# EAGLE board labwiz-module_full_breakout (EAGLE 6.5.0)
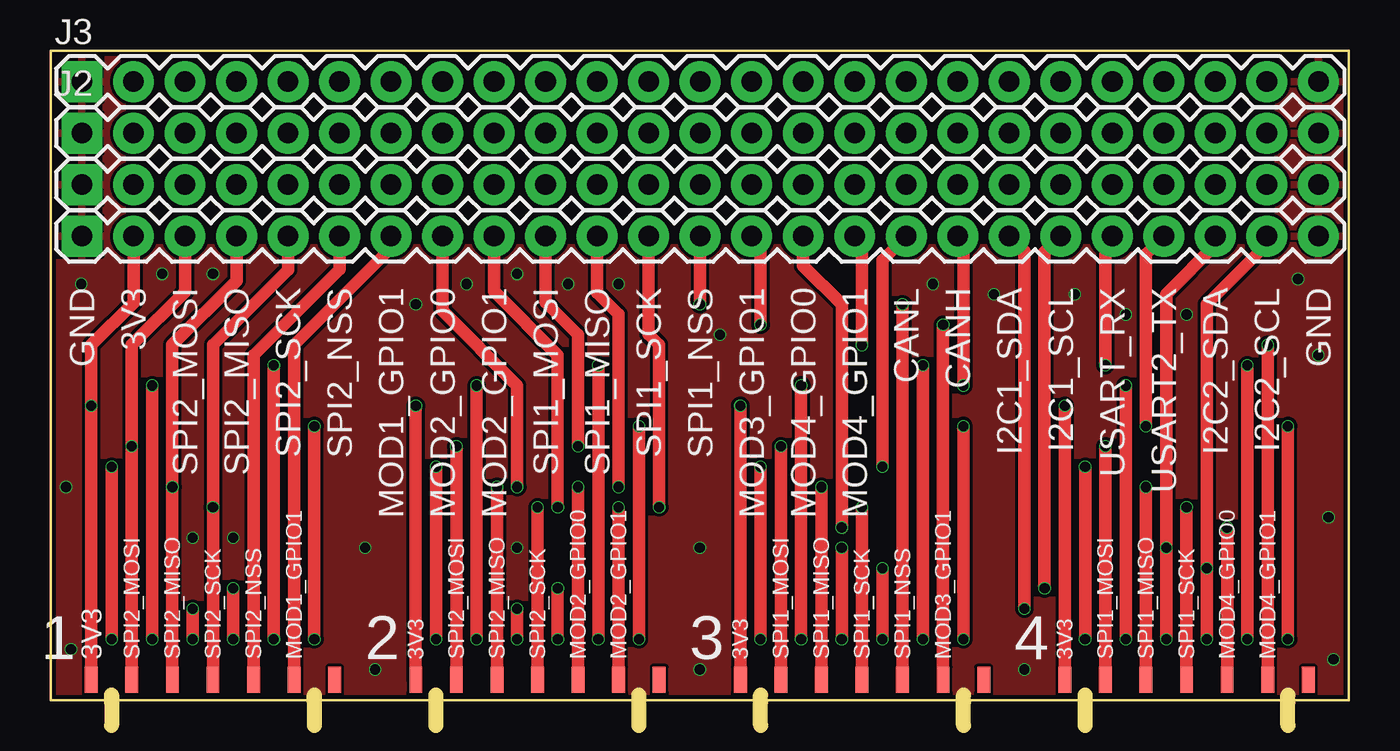
[diagram p0: board, top side]
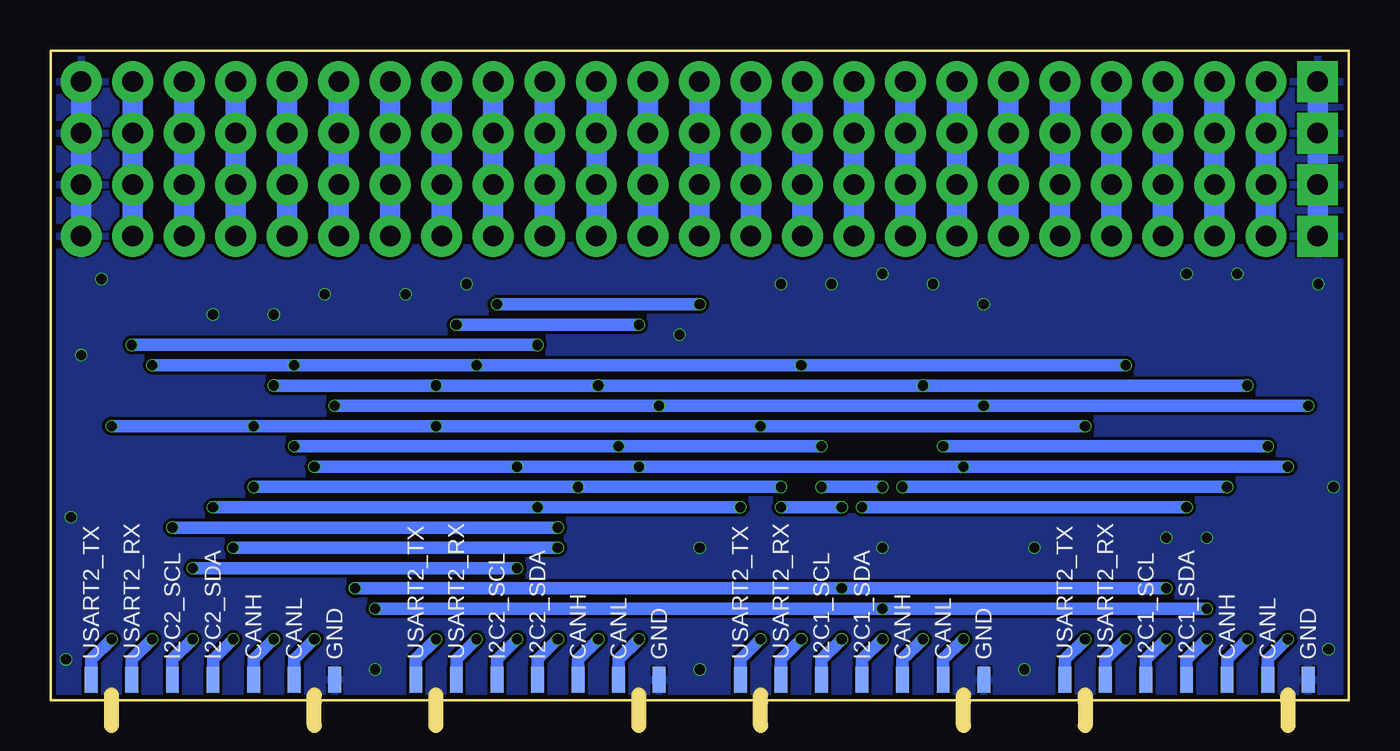
[diagram p1: board, bottom side, seen from below]

Size 64 x 32 mm. Coordinates in mm from the lower left corner, seen from the top.
Outline: 0,32 0,0 64,0 64,32 0,32
Copper layers (1*2+15*16): Top 0.017mm / dielectric 0.5mm / GND 0.017mm / dielectric 0.075mm / 3.3V 0.017mm / dielectric 0.5mm / Bottom 0.017mm
Design rules "PaxInstrument-T400 *": minimum track width 0.1mm, minimum drill 0.2mm, track to track 0.075mm, track to pad 0.075mm, pad to pad 0.075mm, via to via 0.075mm, smd to smd 0.075mm, copper to edge 0.2mm, drill to drill 0.2mm, minimum pad ring 0.5mm, minimum via ring 0.05mm, stop-mask expansion 0.01mm, vias tented up to drill 0.25mm, thermal gap 0.1mm
Net classes: 0 Digital signal: width 0.1 mm, drill 0.2 mm, clearance 0.15 mm; 1 3.3V power: width 0.1 mm, drill 0.2 mm, clearance 0.15 mm; 2 RTC battery: width 0.1 mm, drill 0.2 mm, clearance 0.15 mm; 3 5V power: width 0.1 mm, drill 0.2 mm, clearance 0.15 mm; 4 Analog signal: width 0.1 mm, drill 0.2 mm, clearance 0.15 mm; 5 GND: width 0.1 mm, drill 0.2 mm, clearance 0.15 mm
Milling: 8 lines

## Footprints (pad centres in the part's own frame; a part is rotated, then mirrored left to right if it is on the bottom)
1X25 = drill 1.016 pad 1.88 square: 1 0,0 | drill 1.016 pad 1.88: 2 2.54,0; 3 5.08,0; 4 7.62,0; 5 10.16,0; 6 12.7,0; 7 15.24,0; 8 17.78,0; 9 20.32,0; 10 22.86,0; 11 25.4,0; 12 27.94,0; 13 30.48,0; 14 33.02,0; 15 35.56,0; 16 38.1,0; 17 40.64,0; 18 43.18,0; 19 45.72,0; 20 48.26,0; 21 50.8,0; 22 53.34,0; 23 55.88,0; 24 58.42,0; 25 60.96,0
M07X2_2MM_EDGE = smd 0.635 x 1.27: P$1 0,0; P$3 2,0; P$5 4,0; P$7 6,0; P$9 8,0; P$11 10,0; P$13 12,0 | smd 0.635 x 1.27 bottom: P$2 0,0; P$4 2,0; P$6 4,0; P$8 6,0; P$10 8,0; P$12 10,0; P$14 12,0

## Placement (x,y rotation side)
J1  [1X25]  1.54,25.4 0 top
J2  [1X25]  1.54,27.94 0 top
J3  [1X25]  1.54,30.48 0 top
J4  [1X25]  1.54,22.86 0 top
MODULE5  PI-module-male  [M07X2_2MM_EDGE]  14,1 180 top
MODULE6  PI-module-male  [M07X2_2MM_EDGE]  30,1 180 top
MODULE7  PI-module-male  [M07X2_2MM_EDGE]  46,1 180 top
MODULE8  PI-module-male  [M07X2_2MM_EDGE]  62,1 180 top

## Library data of the parts
J1-J4 = SparkFun-Connectors
MODULE5-MODULE8 = PaxInstruments-Connectors; MF: Pax Instruments; MPN: PIxxxx

## Nets
3.3V: J1.2 J2.2 J3.2 J4.2 MODULE5.P$13 MODULE6.P$13 MODULE7.P$13 MODULE8.P$13
CANH: J1.18 J2.18 J3.18 J4.18 MODULE5.P$10 MODULE6.P$10 MODULE7.P$10 MODULE8.P$10
CANL: J1.17 J2.17 J3.17 J4.17 MODULE5.P$12 MODULE6.P$12 MODULE7.P$12 MODULE8.P$12
GND: J1.1 J1.25 J2.1 J2.25 J3.1 J3.25 J4.1 J4.25 MODULE5.P$14 MODULE6.P$14 MODULE7.P$14 MODULE8.P$14
I2C1_SCL: J1.20 J2.20 J3.20 J4.20 MODULE5.P$6 MODULE6.P$6
I2C1_SDA: J1.19 J2.19 J3.19 J4.19 MODULE5.P$8 MODULE6.P$8
I2C2_SCL: J1.24 J2.24 J3.24 J4.24 MODULE7.P$6 MODULE8.P$6
I2C2_SDA: J1.23 J2.23 J3.23 J4.23 MODULE7.P$8 MODULE8.P$8
MOD1_GPIO1: J1.7 J2.7 J3.7 J4.7 MODULE5.P$3
MOD2_GPIO0: J1.8 J2.8 J3.8 J4.8 MODULE6.P$5
MOD2_GPIO1: J1.9 J2.9 J3.9 J4.9 MODULE6.P$3
MOD3_GPIO1: J1.14 J2.14 J3.14 J4.14 MODULE7.P$3
MOD4_GPIO0: J1.15 J2.15 J3.15 J4.15 MODULE8.P$5
MOD4_GPIO1: J1.16 J2.16 J3.16 J4.16 MODULE8.P$3
SPI1_MISO: J1.11 J2.11 J3.11 J4.11 MODULE7.P$9 MODULE8.P$9
SPI1_MOSI: J1.10 J2.10 J3.10 J4.10 MODULE7.P$11 MODULE8.P$11
SPI1_NSS: J1.13 J2.13 J3.13 J4.13 MODULE7.P$5
SPI1_SCK: J1.12 J2.12 J3.12 J4.12 MODULE7.P$7 MODULE8.P$7
SPI2_MISO: J1.4 J2.4 J3.4 J4.4 MODULE5.P$9 MODULE6.P$9
SPI2_MOSI: J1.3 J2.3 J3.3 J4.3 MODULE5.P$11 MODULE6.P$11
SPI2_NSS: J1.6 J2.6 J3.6 J4.6 MODULE5.P$5
SPI2_SCK: J1.5 J2.5 J3.5 J4.5 MODULE5.P$7 MODULE6.P$7
USART2_RX: J1.21 J2.21 J3.21 J4.21 MODULE5.P$4 MODULE6.P$4 MODULE7.P$4 MODULE8.P$4
USART2_TX: J1.22 J2.22 J3.22 J4.22 MODULE5.P$2 MODULE6.P$2 MODULE7.P$2 MODULE8.P$2

## Tracks (layer width: path | path; a pad name or v marks a point on that pad's centre or on a via)
3.3V  (via drill 0.5)
  Top 0.61: MODULE5.P$13 v2,14.5 2,17.5 4.08,19.58 J4.2 | v50,14.5 MODULE8.P$13 | MODULE7.P$13 v34,14.5 | MODULE6.P$13 v18,14.5
  Bottom 0.61: v2,14.5 v18,14.5 v34,14.5 v50,14.5
  Bottom 1.016: J4.2 J1.2 J2.2 J3.2
CANH  (via drill 0.5)
  Top 0.61: v21,3 v21,15.5 | v5,15.5 v5,3 | v37,3 v37,15.5 | v53,3 v53,15.5 | v45,15.5 45,22.58 J4.18
  Bottom 0.61: MODULE6.P$10 22,2 v21,3 | v5,15.5 v21,15.5 v37,15.5 v45,15.5 v53,15.5 | v5,3 6,2 MODULE5.P$10 | MODULE7.P$10 38,2 v37,3 | MODULE8.P$10 54,2 v53,3
  Bottom 1.016: J4.18 J1.18 J2.18 J3.18
CANL  (via drill 0.5)
  Top 0.61: v51,11.5 v51,3 | v3,3 v3,11.5 | v19,11.5 v19,3 | v35,3 v35,11.5 | v41,11.5 41,21.68 J4.17
  Bottom 0.61: MODULE7.P$12 36,2 v35,3 | v51,11.5 v41,11.5 v35,11.5 v19,11.5 v3,11.5 | v51,3 52,2 MODULE8.P$12 | MODULE5.P$12 4,2 v3,3 | v19,3 20,2 MODULE6.P$12
  Bottom 1.016: J4.17 J1.17 J2.17 J3.17
GND  (via drill 0.5)
  Bottom 1.016: J4.25 J1.25 J2.25 J3.25 | J3.1 J2.1 J1.1 J4.1
  other vias: 1.5,20.5 1,2.5 16,1.5 32,1.5 48,1.5 63.25,2 61.5,20.75 56,19 53,19 50.5,20 46.5,20 43.5,20.5 33,18 32,7.5 28,20.5 23,7.5 18,19.5 9,8 7,8 8,21 5.5,21 15.5,7.5 23,21 25.5,20.5 0.75,10.5 63,9 62.5,17 20.5,20.5
  pour Bottom: 0,32 0,0 64,0 64,32
  pour Top: 0,32 0,0 64,0 64,32
I2C1_SCL  (via drill 0.5)
  Top 0.61: v25,3 v25,5.5 | v9,5.5 v9,3 | v49,5.5 49,22.06 J4.20
  Bottom 0.61: MODULE6.P$6 26,2 v25,3 | v9,5.5 v25,5.5 v49,5.5 | v9,3 10,2 MODULE5.P$6
  Bottom 1.016: J4.20 J1.20 J2.20 J3.20
I2C1_SDA  (via drill 0.5)
  Top 0.61: v23,3 v23,4.5 | v7,4.5 v7,3 | v48,4.5 48,22.12 J4.19
  Bottom 0.61: MODULE6.P$8 24,2 v23,3 | v7,4.5 v23,4.5 v48,4.5 | v7,3 8,2 MODULE5.P$8
  Bottom 1.016: J4.19 J1.19 J2.19 J3.19
I2C2_SCL  (via drill 0.5)
  Top 0.61: v41,3 v41,6.5 | v57,3 v57,6.5 57,19.5 60,22.5 60,22.82 J4.24
  Bottom 0.61: MODULE8.P$6 58,2 v57,3 | MODULE7.P$6 42,2 v41,3 | v41,6.5 v57,6.5
  Bottom 1.016: J4.24 J1.24 J2.24 J3.24
I2C2_SDA  (via drill 0.5)
  Top 0.61: v55,3 v55,7.5 55,20 57.5,22.5 57.5,22.78 J4.23 | v39,3 v39,7.5
  Bottom 0.61: MODULE8.P$8 56,2 v55,3 | MODULE7.P$8 40,2 v39,3 | v39,7.5 v55,7.5
  Bottom 1.016: J4.23 J1.23 J2.23 J3.23
MOD1_GPIO1
  Top 0.61: MODULE5.P$3 12,17.5 16.78,22.28 J4.7
  Bottom 1.016: J4.7 J1.7 J2.7 J3.7
MOD2_GPIO0  (via drill 0.5)
  Top 0.61: MODULE6.P$5 v26,10.5 | v23,10.5 23,15.5 19.32,19.18 J4.8
  Bottom 0.61: v26,10.5 v23,10.5
  Bottom 1.016: J4.8 J1.8 J2.8 J3.8
MOD2_GPIO1  (via drill 0.5)
  Top 0.61: MODULE6.P$3 v28,9.5 | v25,9.5 25,17 21.86,20.14 J4.9
  Bottom 0.61: v28,9.5 v25,9.5
  Bottom 1.016: J4.9 J1.9 J2.9 J3.9
MOD3_GPIO1  (via drill 0.5)
  Top 0.61: MODULE7.P$3 v44,18.5 | J4.14 35,22.42 v35,18.5
  Bottom 0.61: v44,18.5 v35,18.5
  Bottom 1.016: J4.14 J1.14 J2.14 J3.14
MOD4_GPIO0  (via drill 0.5)
  Top 0.61: MODULE8.P$5 v58,8.5 | v39,8.5 39,19.5 37.1,21.4 J4.15
  Bottom 0.61: v58,8.5 v39,8.5
  Bottom 1.016: J4.15 J1.15 J2.15 J3.15
MOD4_GPIO1  (via drill 0.5)
  Top 0.61: MODULE8.P$3 v60,17.5 | J4.16 40,22.5 v40,17.5
  Bottom 0.61: v60,17.5 v40,17.5
  Bottom 1.016: J4.16 J1.16 J2.16 J3.16
SPI1_MISO  (via drill 0.5)
  Top 0.61: MODULE7.P$9 v38,10.5 | MODULE8.P$9 v54,10.5 | v28,10.5 28,19 26.94,20.06 J4.11
  Bottom 0.61: v54,10.5 v38,10.5 v28,10.5
  Bottom 1.016: J4.11 J1.11 J2.11 J3.11
SPI1_MOSI  (via drill 0.5)
  Top 0.61: MODULE7.P$11 v36,12.5 | v52,12.5 MODULE8.P$11 | v26,12.5 26,18 24.4,19.6 J4.10
  Bottom 0.61: v52,12.5 v36,12.5 v26,12.5
  Bottom 1.016: J4.10 J1.10 J2.10 J3.10
SPI1_NSS  (via drill 0.5)
  Top 0.61: MODULE7.P$5 v42,19.5 | J4.13 32,22.84 v32,19.5
  Bottom 0.61: v42,19.5 v32,19.5
  Bottom 1.016: J4.13 J1.13 J2.13 J3.13
SPI1_SCK  (via drill 0.5)
  Top 0.61: MODULE7.P$7 v40,9.5 | MODULE8.P$7 v56,9.5 | v30,9.5 30,17.5 29.48,18.02 J4.12
  Bottom 0.61: v56,9.5 v40,9.5 v30,9.5
  Bottom 1.016: J3.12 J2.12 J1.12 J4.12
SPI2_MISO  (via drill 0.5)
  Top 0.61: MODULE5.P$9 v6,10.5 6,17.5 9.16,20.66 J4.4 | MODULE6.P$9 v22,10.5
  Bottom 0.61: v22,10.5 v6,10.5
  Bottom 1.016: J3.4 J2.4 J1.4 J4.4
SPI2_MOSI  (via drill 0.5)
  Top 0.61: MODULE5.P$11 v4,12.5 4,17.5 6.62,20.12 J4.3 | v20,12.5 MODULE6.P$11
  Bottom 0.61: v4,12.5 v20,12.5
  Bottom 1.016: J4.3 J1.3 J2.3 J3.3
SPI2_NSS
  Top 0.61: MODULE5.P$5 10,17 14.24,21.24 J4.6
  Bottom 1.016: J4.6 J1.6 J2.6 J3.6
SPI2_SCK  (via drill 0.5)
  Top 0.61: MODULE5.P$7 v8,9.5 8,17.5 11.7,21.2 J4.5 | MODULE6.P$7 v24,9.5
  Bottom 0.61: v24,9.5 v8,9.5
  Bottom 1.016: J4.5 J1.5 J2.5 J3.5
USART2_RX  (via drill 0.5)
  Top 0.61: v59,3 v59,16.5 | v43,16.5 v43,3 | v27,3 v27,16.5 | v11,3 v11,16.5 | J4.21 52,22.52 v52,16.5
  Bottom 0.61: MODULE8.P$4 60,2 v59,3 | v59,16.5 v52,16.5 v43,16.5 v27,16.5 v11,16.5 | v43,3 44,2 MODULE7.P$4 | MODULE6.P$4 28,2 v27,3 | MODULE5.P$4 12,2 v11,3
  Bottom 1.016: J4.21 J1.21 J2.21 J3.21
USART2_TX  (via drill 0.5)
  Top 0.61: v13,3 v13,13.5 | v61,13.5 v61,3 | v29,3 v29,13.5 | v45,3 v45,13.5 | J4.22 54,21.98 v54,13.5
  Bottom 0.61: MODULE5.P$2 14,2 v13,3 | MODULE6.P$2 30,2 v29,3 | MODULE8.P$2 62,2 v61,3 | v13,13.5 v29,13.5 v45,13.5 v54,13.5 v61,13.5 | MODULE7.P$2 46,2 v45,3
  Bottom 1.016: J4.22 J1.22 J2.22 J3.22

## Text on the board
tPlace: GND | 3V3 | SPI2_MOSI | SPI2_MISO | SPI2_SCK | SPI2_NSS | MOD1_GPIO1 | MOD2_GPIO0 | MOD2_GPIO1 | SPI1_MOSI | SPI1_MISO | SPI1_SCK | SPI1_NSS | MOD3_GPIO1 | MOD4_GPIO0 | MOD4_GPIO1 | CANL | CANH | I2C1_SDA | I2C1_SCL | USART_RX | USART2_TX | I2C2_SDA | I2C2_SCL | GND | 1 | 3V3 | SPI2_MOSI | SPI2_MISO | SPI2_SCK | SPI2_NSS | MOD1_GPIO1 | 2 | 3V3 | SPI2_MOSI | SPI2_MISO | SPI2_SCK | MOD2_GPIO0 | MOD2_GPIO1 | 3 | 3V3 | SPI1_MOSI | SPI1_MISO | SPI1_SCK | SPI1_NSS | MOD3_GPIO1 | 4 | 3V3 | SPI1_MOSI | SPI1_MISO | SPI1_SCK | MOD4_GPIO0 | MOD4_GPIO1
bPlace: GND | CANL | CANH | I2C1_SDA | I2C1_SCL | USART2_RX | USART2_TX | GND | CANL | CANH | I2C1_SDA | I2C1_SCL | USART2_RX | USART2_TX | GND | CANL | CANH | I2C2_SDA | I2C2_SCL | USART2_RX | USART2_TX | GND | CANL | CANH | I2C2_SDA | I2C2_SCL | USART2_RX | USART2_TX